# Altium PCB LC_PCB.PcbDoc
Units mil, origin at the board's own origin, x right, y up, seen from the top; angles counter-clockwise.
Board outline 2410.03 x 1610.03 mil, 4 copper layers (Top Layer, Inner1, Inner2, Bottom Layer), stack 61.811 mil thick; 52 components, 35 nets, 171 pads, 104 vias.
Unrouted connection lines stored in the file: 42.
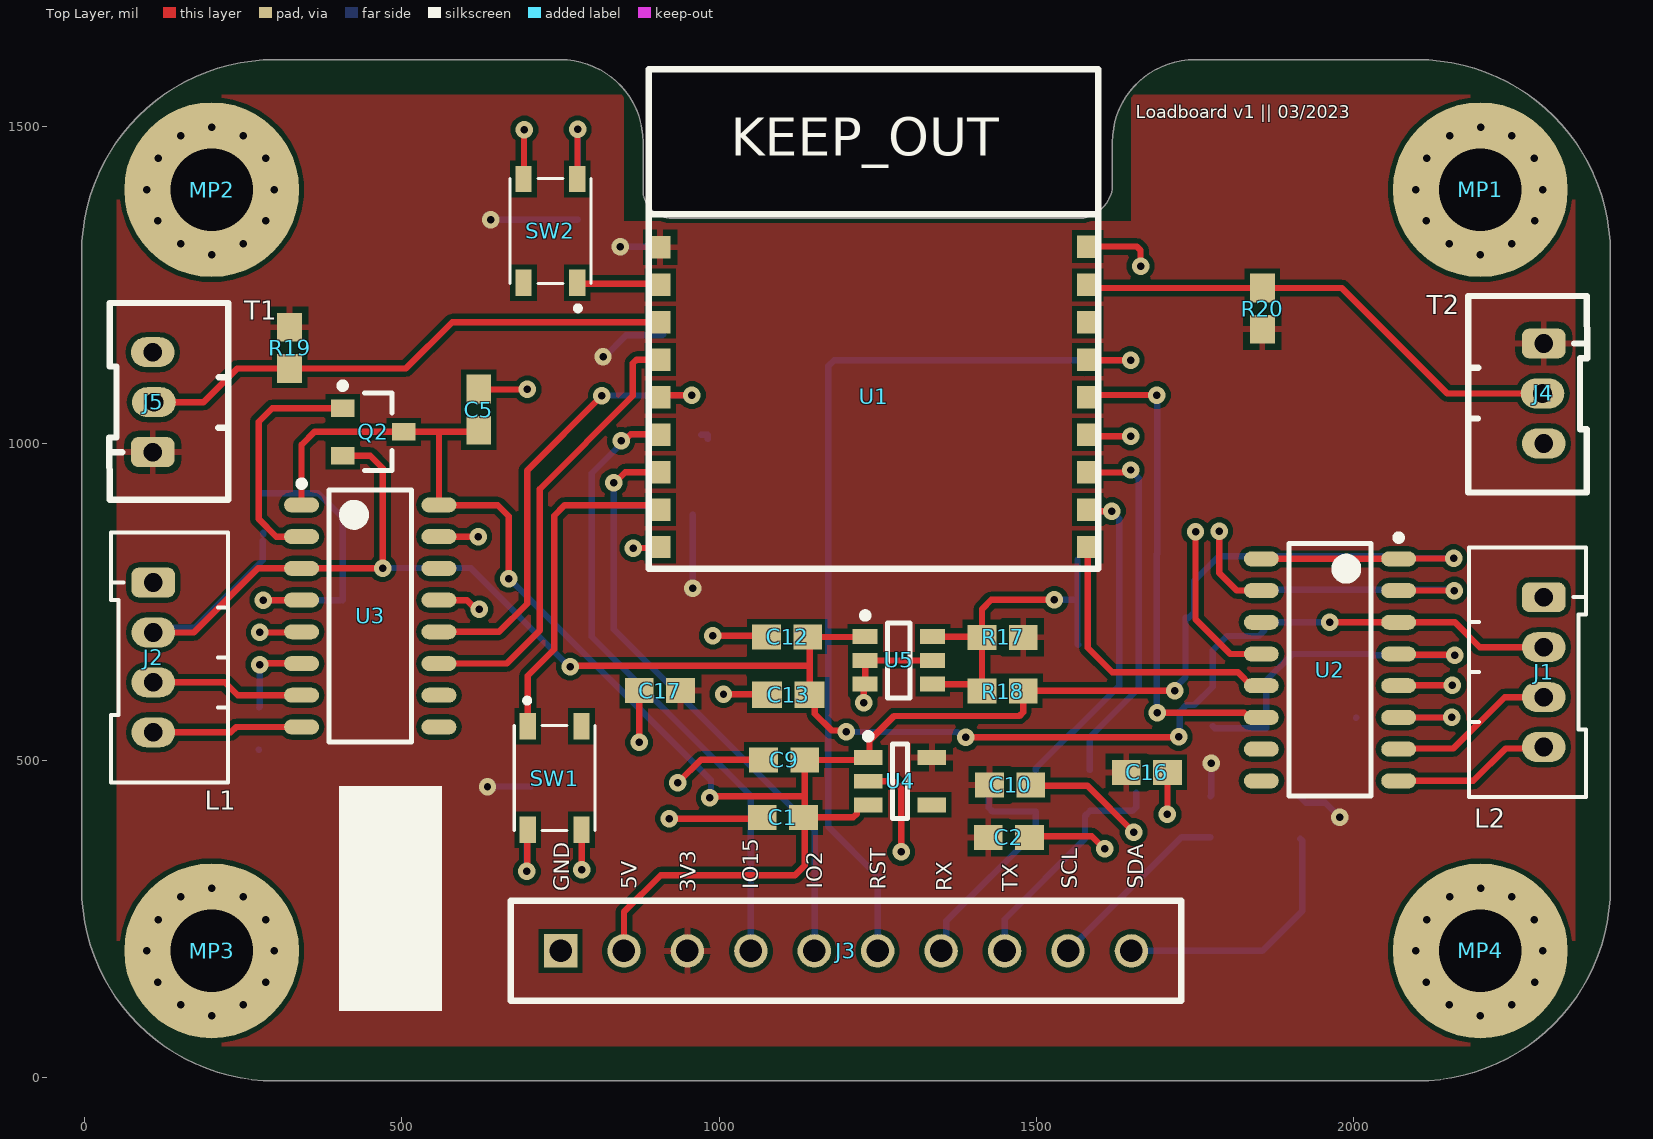
[diagram p0: Top Layer view]
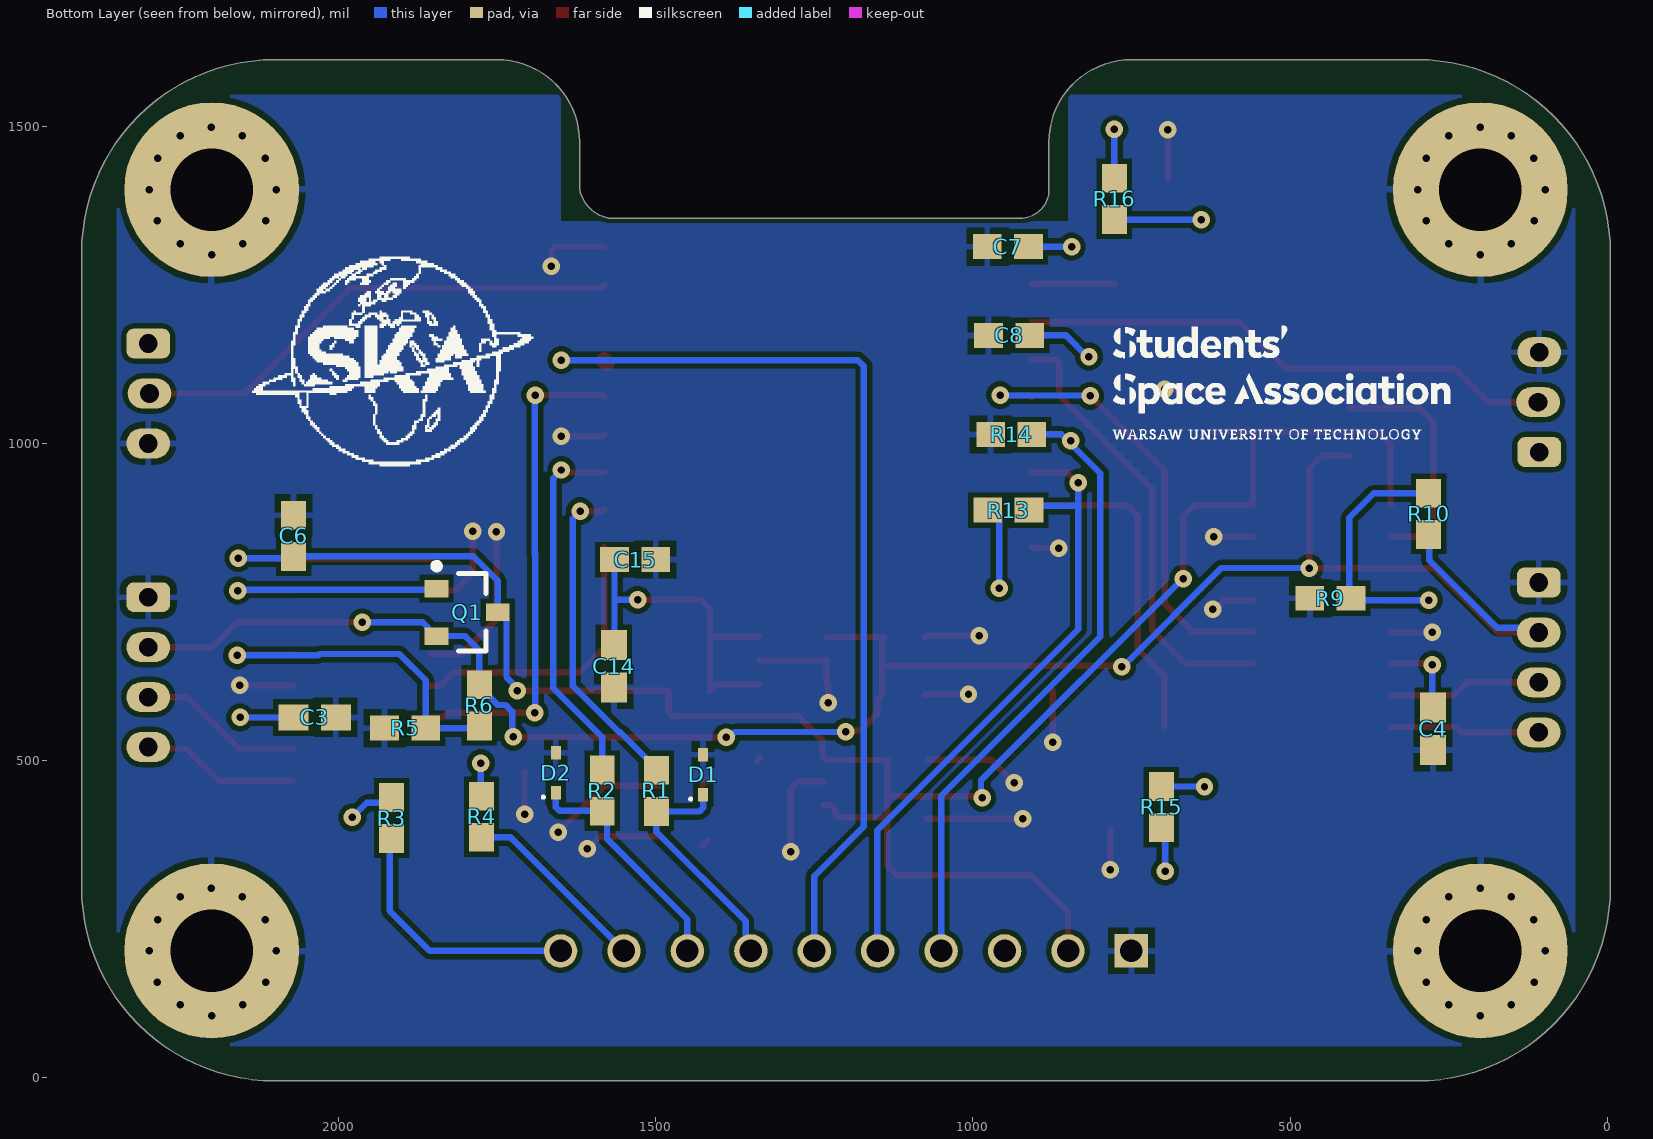
[diagram p1: Bottom Layer view, seen from below]
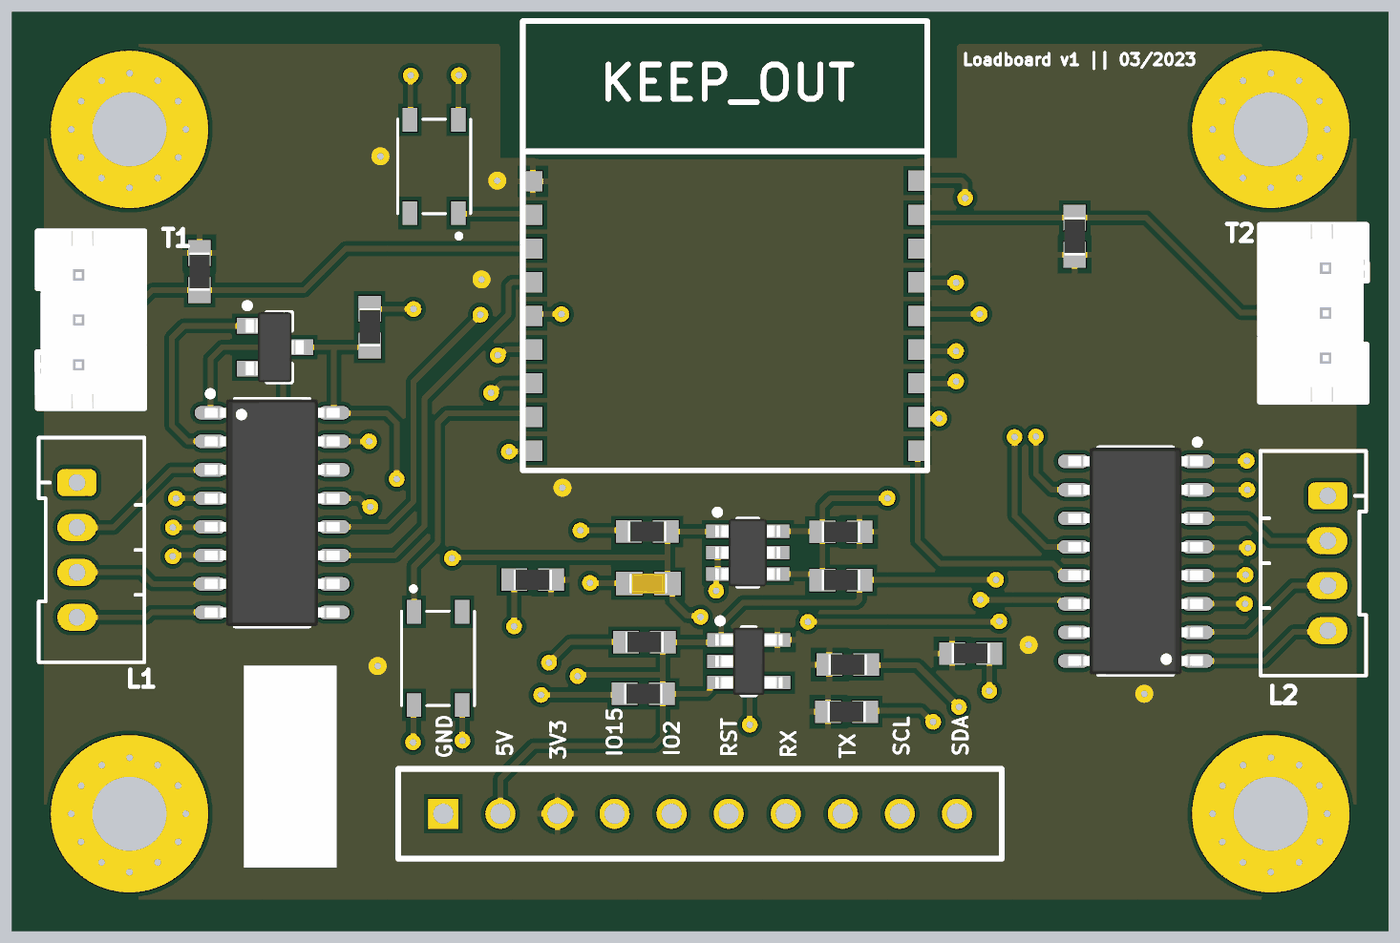
[diagram p2: 3D render of the assembled board from above, using the file's embedded part models]
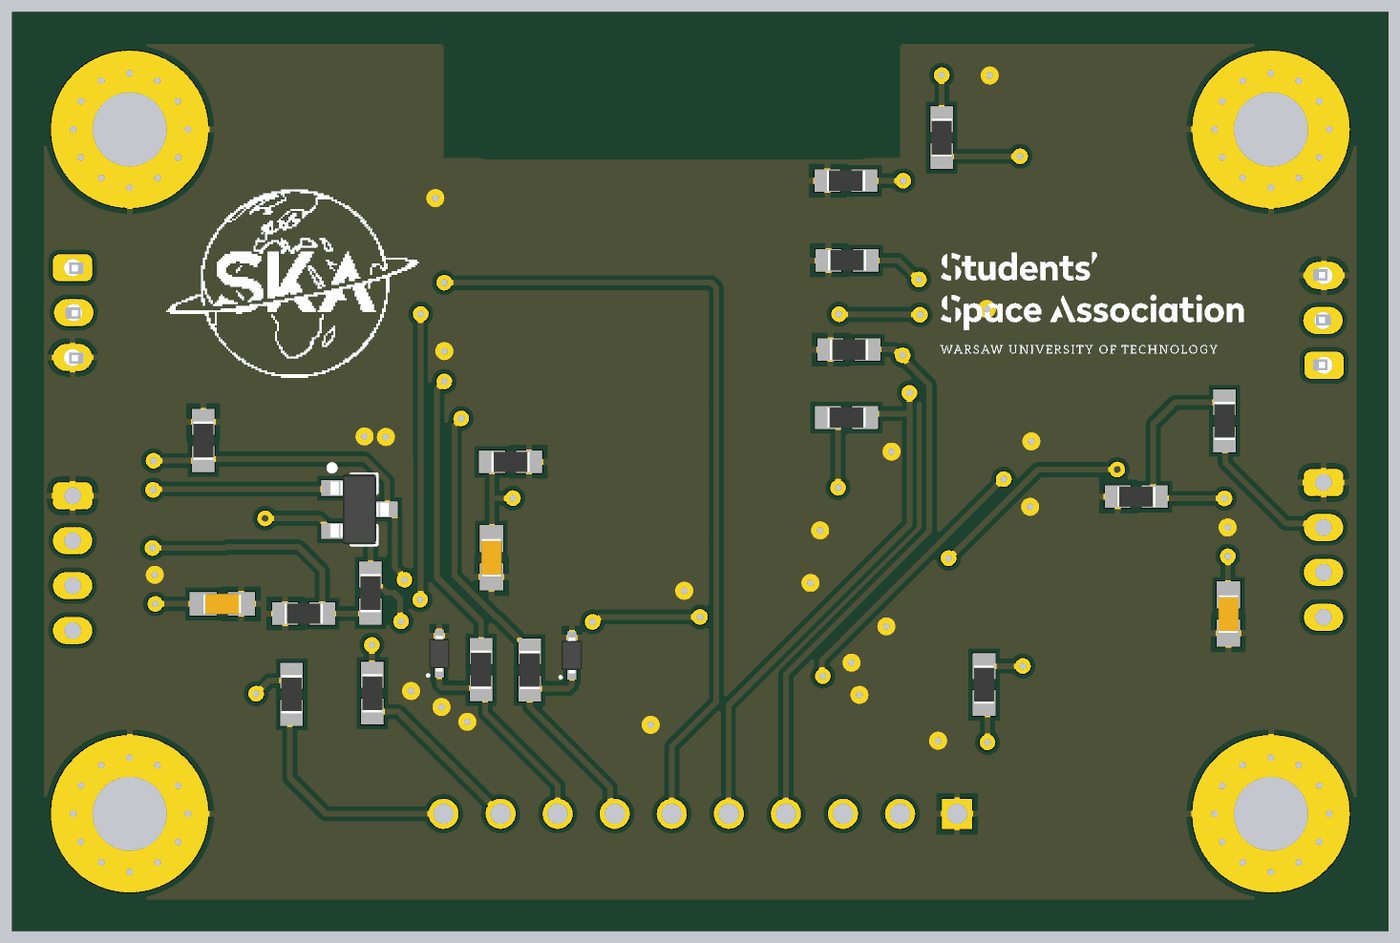
[diagram p3: 3D render of the assembled board from below, using the file's embedded part models]

## Layer stack, top to bottom
Top Solder: solder mask 0.5906, Solder Resist, Dk 3.5
Top Layer: signal copper 1.378
Prepreg1: prepreg 7.874, PP-022, Dk 4.6
Inner1: signal copper 0.689
Core: core 41.9291, Core-043, Dk 4.6
Inner2: signal copper 0.689
Prepreg2: prepreg 7.874, PP-022, Dk 4.6
Bottom Layer: signal copper 1.378
Bottom Solder: solder mask 0.5906, Solder Resist, Dk 3.5

## Board outline
-5.01,300 -5.01,1300 cw(c300,1300) 299.97,1605.02 300,1605.02 750,1605.02 cw(c750,1475) 880.01,1475 880.01,1400 880.01,1399.97 ccw(c925,1400) 925,1355.02 1574.49,1355.02 ccw(c1562.5,1412.5) 1619.98,1400.51 1619.98,1475 cw(c1750,1475) 1750,1605.02 2100,1605.02 cw(c2100,1300) 2405.02,1300 2405.02,300 cw(c2100,300) 2100,-5.01 300,-5.01 cw(c300,300)

## Design rules (kind name [scope] priority, off if disabled: settings)
AssemblyTestPointUsage [All] p1: valid=2
AssemblyTestpoint [All] p1: testpointundercomponent=TRUE minsize=40 maxsize=100 preferedsize=60 minholesize=0 maxholesize=40 preferedholesize=32.01 testpointgrid=0.98 usegrid=TRUE gridoriginx=200 gridoriginy=200 gridtolerance=0.01 allowsidetop=TRUE allowsidebottom=TRUE
BoardOutlineClearance [All] p1: gap=7.87 ignorepadtopadclearanceinfootprint=FALSE
Clearance [All vs not OnLayer('Top Layer') and not OnLayer('BottomLayer')] p1: gap=7.87 ignorepadtopadclearanceinfootprint=FALSE except(3.94: Text-Text; 5: Arc-Arc Arc-Track Track-Track SMDPad-SMDPad; 5.91: Arc-Text Track-Text SMDPad-Text THPad-Text Via-Text Fill-Text Poly-Text Region-Text Text-Hole; 10: Arc-Via Arc-Hole Track-Via Track-Hole SMDPad-Via SMDPad-Hole THPad-Via THPad-Hole Via-Via Via-Hole Fill-Hole Poly-Hole Region-Hole; 12.99: Arc-THPad Track-THPad; 21.26: SMDPad-THPad THPad-THPad)
Clearance Clearance_1 [All vs OnLayer('Top Layer') or OnLayer('Bottom Layer')] p2: gap=7.87 ignorepadtopadclearanceinfootprint=FALSE except(3.54: Arc-Arc Arc-Track Track-Track; 3.94: Text-Text; 5: SMDPad-SMDPad; 5.91: Arc-Text Track-Text SMDPad-Text THPad-Text Via-Text Fill-Text Poly-Text Region-Text Text-Hole; 10: Arc-Via Arc-Hole Track-Via Track-Hole SMDPad-Via SMDPad-Hole THPad-Via THPad-Hole Via-Via Via-Hole Fill-Hole Poly-Hole Region-Hole; 12.99: Arc-THPad Track-THPad; 21.26: SMDPad-THPad THPad-THPad)
ComponentClearance [All] p1: gap=7.87 collisioncheckmode=3 verticalgap=7.87 showdistances=FALSE
DiffPairsRouting [All] p1: maxlimit=19.68 minlimit=7.87 mostfreqgap=11.81 toplayer_minwidth=7.87 toplayer_maxwidth=19.68 toplayer_prefwidth=11.81 midlayer1_minwidth=7.87 midlayer1_maxwidth=19.68 midlayer1_prefwidth=11.81 midlayer2_minwidth=7.87 midlayer2_maxwidth=19.68 midlayer2_prefwidth=11.81 bottomlayer_minwidth=7.87 bottomlayer_maxwidth=19.68 bottomlayer_prefwidth=11.81 maxuncoupledlength=590.55
FabricationTestPointUsage FabricationTestpointUsage [All] p1: valid=2 allowmultiple=FALSE
FabricationTestpoint [All] p1: side=3 testpointundercomponent=TRUE minsize=40 maxsize=100 preferedsize=60 minholesize=0 maxholesize=40 preferedholesize=32.01 testpointgrid=0.98 allowsidetop=TRUE allowsidebottom=TRUE usegrid=TRUE gridoriginx=200 gridoriginy=200 gridtolerance=0.01
Height [All] p1: minheight=0 maxheight=-35835.32 prefheight=0
HoleSize [All] p1: absolutevalues=TRUE maxlimit=248.03 minlimit=7.87 maxpercent=80.000 minpercent=20.000
HoleToHoleClearance [All] p1: gap=21.26 allowstackedmicrovias=TRUE
MinimumAnnularRing [All] p1: minimumring=7.87
MinimumSolderMaskSliver [All] p1: minsoldermaskwidth=0
PlaneClearance [All] p1: clearance=10
PlaneConnect [All] p1: pad.planeconnectstyle=Relief pad.reliefexpansion=20 pad.reliefentries=4 pad.reliefconductorwidth=10 pad.reliefairgap=10 via.planeconnectstyle=Direct via.reliefexpansion=20 via.reliefentries=4 via.reliefconductorwidth=10 via.reliefairgap=10
PolygonConnect [All] p1: thpad.connectstyle=Relief thpad.reliefconductorwidth=10 thpad.reliefentries=4 thpad.polygonreliefangle="90 Angle" thpad.airgapwidth=10 smdpad.connectstyle=Relief smdpad.reliefconductorwidth=10 smdpad.reliefentries=4 smdpad.polygonreliefangle="90 Angle" smdpad.airgapwidth=10 via.connectstyle=Direct via.reliefconductorwidth=10 via.reliefentries=4 via.polygonreliefangle="90 Angle" via.airgapwidth=10
RoutingCorners [All] p1: cornerstyle=45-Degree minsetback=100 maxsetback=200
RoutingLayers [All] p1: top layer_v5=TRUE mid layer 1_v5=FALSE mid layer 2_v5=FALSE bottom layer_v5=TRUE
RoutingVias [All] p1: holewidth=11.81 width=27.56 viastyle="Through Hole" minholewidth=7.87 minwidth=23.62 maxholewidth=248.03 maxwidth=263.78
SilkToSilkClearance [All] p1: silktosilkclearance=0
SilkToSolderMaskClearance [IsPad] p1: minsilkscreentomaskgap=0 clearancetoexposedcopper=TRUE
SolderMaskExpansion [All] p1: expansion=1.97 istentingtop=FALSE
UnRoutedNet [All] p1: checkbadconnections=TRUE
Width [All] p1: maxlimit=393.7 minlimit=7.87 preferedwidth=10
13 further rules are at their usual default settings.

## Classes and differential pairs
net class POWER_OUT: 3V3
net class Power_IN: 5V

## Components (designator, comment, footprint, x,y, rotation, side; value= is the part's Value field where it differs from the comment)
C1 "C" RESC1608X06M[0603] 1100.39,410.43 r0 top value=1u/10V
C2 "C" RESC1608X06M[0603] 1456.69,378.94 r180 top value=1u/10V
C3 "C" CAPC1608X09M[0603] 2037.8,568 r0 bottom value=0.1u/10V
C4 "C" CAPC1608X09M[0603] 274.61,550.2 r90 bottom value=0.1u/10V
C5 "C" RESC1608X06M[0603] 621.06,1053.15 r270 top value=10u/10V
C6 "C" RESC1608X06M[0603] 2070.87,854.33 r270 bottom value=1u/10V
C7 "C" RESC1608X06M[0603] 944.88,1310.04 r180 bottom value=1u/10V
C8 "C" RESC1608X06M[0603] 942.91,1170.28 r180 bottom value=10u/10V
C9 "C" RESC1608X06M[0603] 1102.36,500.98 r0 top value=10u/10V
C10 "C" RESC1608X06M[0603] 1458.66,461.61 r180 top value=10u/10V
C12 "C" RESC1608X06M[0603] 1107.28,694.88 r0 top value=10u/10V
C13 "C" CAPC1608X09M[0603] 1109.25,603.74 r0 top value=0.1u/10V
C14 "C" CAPC1608X09M[0603] 1565.94,649.02 r90 bottom value=0.1u/10V
C15 "C" RESC1608X06M[0603] 1532.48,816.93 r0 bottom value=10u/10V
C16 "C" RESC1608X06M[0603] 1674.21,481.3 r180 top value=100n/10V
C17 "C" RESC1608X06M[0603] 906.5,610.24 r0 top value=100n/10V
D1 "ESD5Z2.5T1G" SODFL160X60-2N 1425.2,477.76 r90 bottom
D2 "ESD5Z2.5T1G" SODFL160X60-2N 1657.48,480.71 r90 bottom
J1 "JST_PH_B4B-PH-K-S" JST_PH_B4B-PH-K-S 2300,639.37 r270 top
J2 "JST_PH_B4B-PH-K-S" JST_PH_B4B-PH-K-S 108,662.63 r270 top
J3 "Gold_Pinx12" Gold_Pinx10 750,200 r90 top
J4 "B3B-PH-K-S(LF)(SN)" B3B-PH-K-S(LF)(SN) 2300,1157.48 r270 top
J5 "B3B-PH-K-S(LF)(SN)" B3B-PH-K-S(LF)(SN) 107.03,986.26 r90 top
MP1 "Mounting hole" Mounting_hole_M3 2200,1400 r0 top
MP2 "Mounting hole" Mounting_hole_M3 200,1400 r0 top
MP3 "Mounting hole" Mounting_hole_M3 200,200.03 r0 top
MP4 "Mounting hole" Mounting_hole_M3 2200,200.03 r0 top
Q1 "MMBT4403" SOT95P240X120-3N 1797.24,733.66 r180 bottom
Q2 "MMBT4403" SOT95P240X120-3N 454.72,1018.11 r0 top
R1 "R" RESC1608X06M[0603] 1499.02,452.17 r90 bottom value=100R/5%
R2 "R" RESC1608X06M[0603] 1584.24,452.62 r90 bottom value=100R/5%
R3 "R" RESC1608X06M[0603] 1916.34,409.45 r90 bottom value=10K/5%
R4 "R" RESC1608X06M[0603] 1774.61,411.42 r90 bottom value=10K/5%
R5 "R" RESC1608X06M[0603] 1895,551 r180 bottom value=68K/5%
R6 "R" RESC1608X06M[0603] 1778,587 r90 bottom value=1K/5%
R9 "R" RESC1608X06M[0603] 436.22,755.91 r180 bottom value=68K/5%
R10 "R" RESC1608X06M[0603] 281.5,888.78 r270 bottom value=1K/5%
R13 "R" RESC1608X06M[0603] 943.9,894.68 r180 bottom value=10K/5%
R14 "R" RESC1608X06M[0603] 939.46,1013.83 r0 bottom value=10K/5%
R15 "R" RESC1608X06M[0603] 702.72,426.5 r90 bottom value=10K/5%
R16 "R" RESC1608X06M[0603] 777,1385.52 r270 bottom value=10K/5%
R17 "R" RESC1608X06M[0603] 1446.85,694.29 r0 top value=0/10%
R18 "R" RESC1608X06M[0603] 1446.85,609.65 r0 top value=0/10%
R19 "R" RESC1608X06M[0603] 322.83,1150.59 r270 top value=4k7/5%
R20 "R" RESC1608X06M[0603] 1856.3,1212.6 r90 top value=4k7/5%
SW1 "PTS810 SJM 250 SMTR LFS" "PTS810 SJM 250 SMTR LFS" 740.72,472.5 r270 top
SW2 "PTS810 SJM 250 SMTR LFS" "PTS810 SJM 250 SMTR LFS" 734,1335 r90 top
U1 "ESP-WROOM-02 module" ESP-WROOM-02 1236.71,1086.67 r0 top
U2 "ADC_HX711" SOP127P600X259-16N#1 1963,643 r180 top
U3 "ADC_HX711" SOP127P600X259-16N#2 450,728 r0 top
U4 "MCP1802T-3302I/OT" SOT95P280X145-5N 1285.2,467.4 r0 top
U5 "MCP1501T-33E/CHY" SOT95P280X125-6N 1283.46,657.87 r0 top

## Footprints (in the part's own frame and the unit in brackets; to place one, negate y for a bottom-side part, rotate by r counter-clockwise, add the part's x,y. Pads: shape width x height; smd on the part's side, far side on the other; paste and mask are expansions set on the pad)
B3B-PH-K-S(LF)(SN) [mm]
  rrect50% 1.2x1.75 hole 0.75: 1(0,0)
  oval 1.2x1.75 hole 0.75: 2(2,-0.05) 3(4,0)
  silkscreen extent -1.91,-3.03 5.97,1.74, body extent -1.92,-2.9 5.97,1.6, height 5.81
CAPC1608X09M[0603] [mm] "Chip Capacitor, 2-Leads, Body 1.60x0.80mm, IPC Low Density"
  rect 1.2x1.05 smd: 1(-0.85,0) 2(0.85,0)
  body extent -0.85,-0.45 0.85,0.45, height 0.9
ESP-WROOM-02 [mm] "The ESP8266 chip for  wi-fi communication in the 2.4 GHz band. 3-3.6V, SMD"
  rect 0.85x0.9 smd: 1(-8.375,5.65) 2(-8.375,4.15) 3(-8.375,2.65) 4(-8.375,1.15) 5(-8.375,-0.35) 6(-8.375,-1.85) 7(-8.375,-3.35) 8(-8.375,-4.85) 9(-8.375,-6.35) 10(8.745,-6.35) 11(8.745,-4.85) 12(8.745,-3.35) 13(8.745,-1.85) 14(8.745,-0.35) 15(8.745,1.15) 16(8.745,2.65) 17(8.745,4.15) 18(8.745,5.675)
  silkscreen extent -8.83,-7.22 9.17,12.78
Gold_Pinx10 [mm] "Gold pin connector with 10 pin e = 2.54mm"
  rect 1.34x1.34 hole 0.9: 1(0,0)
  round 1.34 hole 0.9: 2(0,-2.54) 3(0,-5.08) 4(0,-7.62) 5(0,-10.16) 6(0,-12.7) 7(0,-15.24) 8(0,-17.78) 9(0,-20.32) 10(0,-22.86)
  silkscreen extent -2,-24.86 2,2
JST_PH_B4B-PH-K-S [mm] "JST 4-pin connector, male, vertical, pitch 2.00mm"
  rrect50% 1.2x1.75 hole 0.75: 1(-3,0)
  oval 1.2x1.75 hole 0.75: 2(-1,0) 3(1,0) 4(3,0)
  silkscreen extent -5,-3 5,1.7, body extent -4.95,-3 4.95,1.7, height 6.01
Mounting_hole_M3 [mm] "Mounting hole for M3 screw"
  round 7 / inner round 5 / far side round 7 hole 3.3 unplated: 1(0,0)
"PTS810 SJM 250 SMTR LFS" [mm] "switch"
  rect 1.05x0.65 smd: 1(-2.075,-1.075) 2(2.075,-1.075) 3(-2.075,1.075) 4(2.075,1.075)
  silkscreen extent -3.2,-1.62 2.1,1.62
RESC1608X06M[0603] [mm] "Chip Resistor, 2-Leads, Body 1.60x0.80mm, IPC Low Density"
  rect 1.15x1 smd: 1(-0.825,0) 2(0.825,0)
  body extent -0.85,-0.45 0.85,0.45, height 0.55
SODFL160X60-2N [mm] "SODFL, 2-Leads, Body 0.80x1.60mm, IPC Medium Density"
  rect 0.55x0.4 smd: 1(-0.8,0) 2(0.8,0)
  silkscreen extent -1.02,0.45 -0.93,0.55, body extent -0.8,-0.45 0.8,0.45, height 0.6
SOP127P600X259-16N#1 [mm] "SOP, 16-Leads, Body 9.90x3.90mm, Pitch 1.27mm, IPC Medium Density"
  oval 1.4x0.6 smd: 1(-2.75,-4.445) 2(-2.75,-3.175) 3(-2.75,-1.905) 4(-2.75,-0.635) 5(-2.75,0.635) 6(-2.75,1.905) 7(-2.75,3.175) 8(-2.75,4.445) 9(2.75,4.445) 10(2.75,3.175) 11(2.75,1.905) 12(2.75,0.635) 13(2.75,-0.635) 14(2.75,-1.905) 15(2.75,-3.175) 16(2.75,-4.445)
  silkscreen extent -2.88,-5.42 1.65,5.05, body extent -3,-5.05 3,5.05, height 2.59
SOP127P600X259-16N#2 [mm] "SOP, 16-Leads, Body 9.90x3.90mm, Pitch 1.27mm, IPC Medium Density"
  oval 1.4x0.6 smd: 1(-2.75,4.445) 2(-2.75,3.175) 3(-2.75,1.905) 4(-2.75,0.635) 5(-2.75,-0.635) 6(-2.75,-1.905) 7(-2.75,-3.175) 8(-2.75,-4.445) 9(2.75,-4.445) 10(2.75,-3.175) 11(2.75,-1.905) 12(2.75,-0.635) 13(2.75,0.635) 14(2.75,1.905) 15(2.75,3.175) 16(2.75,4.445)
  silkscreen extent -2.87,-5.05 1.65,5.42, body extent -3,-5.05 3,5.05, height 2.59
SOT95P240X120-3N [mm] "SOT23, 3-Leads, Body 2.92x2.40mm, Pitch 0.95mm, IPC Medium Density"
  rect 0.95x0.7 smd: 1(-1.225,0.95) 2(-1.225,-0.95) 3(1.225,0)
  silkscreen extent -1.35,-1.55 0.75,1.97, body extent -1.34,-1.56 1.34,1.56, height 1.2
SOT95P280X125-6N [mm] "SOT23, 6-Leads, Body 2.90x2.80mm, Pitch 0.95mm, IPC Medium Density"
  rect 1x0.6 smd: 1(-1.35,0.95) 2(-1.35,0) 3(-1.35,-0.95) 4(1.35,-0.95) 5(1.35,0) 6(1.35,0.95)
  silkscreen extent -1.47,-1.5 0.45,1.92, body extent -1.45,-1.5 1.45,1.5, height 1.25
SOT95P280X145-5N [mm] "SOT23, 5-Leads, Body 2.90x2.80mm, Pitch 0.95mm, IPC Medium Density"
  rect 1.15x0.6 smd: 1(-1.275,0.95) 2(-1.275,0) 3(-1.275,-0.95) 4(1.275,-0.95) 5(1.275,0.95)
  silkscreen extent -1.4,-1.5 0.3,1.92, body extent -1.5,-1.5 1.5,1.5, height 1.45

## Part data
C1 C2 C3 C4 C5 C6 C7 C8 C9 C10 C12 C13 C14 C15 C16 C17: "Standard capacitor", Package=0603
D1 D2: library part D_Zener, "ESD protection diode, 4V", Package=SOD−523, Datasheet=https://www.onsemi.com/pdf/datasheet/esd5z2.5t1-d.pdf, PN=ESD5Z2.5T1G
J1 J2: "JST 4-pin connector, male, vertical, pitch 2.00mm", HelpURL=https://www.tme.eu/Document/bde47a97a79ef7b2143e7f603cd40725/PH.pdf, PN=B4B-PH-K-S
J3: library part Gold_pin, "GoldPin Conector x12 pitch 2.54"
J4 J5: "Connector Header, PH Series, 3 Position, 2.00mm, Through Hole, Press-Fit, Solder, Natural", Datasheet=https://octopart.com/datasheet/b3b-ph-k-s%28lf%29%28sn%29-jst-248869, HelpURL=https://octopart.com/b3b-ph-k-s%28lf%29%28sn%29-jst-248869
Q1 Q2: library part sPNP, "Bipolar Transistors - BJT SOT-23 PNP GEN PUR", Package=SOT-23-3L, Datasheet=https://www.onsemi.com/pdf/datasheet/mmbt4403-d.pdf, PN=MMBT4403
R1 R2 R3 R4 R5 R6 R9 R10 R13 R14 R15 R16 R17 R18 R19 R20: "Standard resistor", Package=0603
SW1 SW2: library part PTS810XXXXXXXX, "TACT microswitch; SPST-NO; Pos: 2; 0.05A/16VDC; SMT; lack", Datasheet=https://www.tme.eu/Document/07a775ba34ae8afc76cf6dcf9fe6d1c4/PTS810SJG250SMTRLF.PDF, HelpURL=https://www.tme.eu/pl/details/pts810sjm250smtrlf/mikroprzelaczniki-tact/c-k/pts810-sjm-250-smtr-lfs/
U1: library part ESP-WROOM-02, "The ESP8266 chip for wi-fi communication in the 2.4 GHz band. 3-3.6V SMD", Datasheet=https://www.espressif.com/sites/default/files/documentation/0c-esp-wroom-02_datasheet_en.pdf, Help_URL=https://botland.store/esp8266-wifi-modules/5391-wifi-system-esp8266-esp-wroom-02-smd-5904422333508.html
U2 U3: library part HX711, "24-Bit Analog-to-Digital Converter (ADC) for Weigh Scales", Package=SOP-16L, Datasheet=https://cdn.sparkfun.com/datasheets/Sensors/ForceFlex/hx711_english.pdf
U4: library part MCP1802T-3302I, "LDO Voltage Regulators 200 mA low quiescent current and low noise LDO", Package=SOT-23-5, Datasheet=https://www.tme.eu/Document/a35250a3ec1de112ad6016307ea8a51d/MCP1802T-1802IO.pdf, HelpURL=https://www.tme.eu/pl/en/details/mcp1802t-3302io/ldo-unregulated-voltage-regulators/microchip-technology/mcp1802t-3302i-ot/
U5: "Voltage References Precision Buffered Voltage Reference", Package=SOT-23, DATA_SHEET=https://www.mouser.pl/datasheet/2/268/MCP1501_Data_Sheet_DS20005474F-2932251.pdf, HELP_LINK=https://www.mouser.pl/ProductDetail/Microchip-Technology-Atmel/MCP1501T-33E-CHY?qs=8cKuZ6Ok2lZxgW6mutm0tA%3D%3D

## Via types
v1: diameter 27.56, hole 11.81, Top Layer to Bottom Layer, 56 vias
v2: diameter 39.37, hole 11.81, Top Layer to Bottom Layer, 48 vias

## Nets (pads, with @x,y where several pads share a name; then routed paths per layer and width w, separated by ;. In a path a pad name is that pad's centre, name@x,y a point inside that pad or via, vN(x,y) a via of type N, cw(c..) or ccw(c..) an arc to the next point about the centre after c; other vN are vias at no path point)
3V3: C2.2 C7.2 C8.2 C10.2 C16.2 C17.2 J3.3 J4.1 J5.1 R3.2 R4.2 R13.1 R15.2 R16.2 R17.2 R19.1 R20.1 U1.1 U4.5 | length 661.9
  Top Layer w10: U1.1@905.07,1311.02 U1.1 ; U4.5 U4.5@1340.25,499.94 ; C10.2@1416.05,471.74 C10.2 ; C2.2@1418.8,373.52 C2.2@1426.18,366.14
  Bottom Layer w10: v1(634.84,459.06) 702.65,459.06 R15.2 ; v1(639.76,1352.76) 776.72,1352.76 R16.2 ; v1(816.93,1136.81) 819.78,1136.81 853.24,1170.28 C8.2 C8.2@912.4,1172.24 ; v1(844.49,1310.04) C7.2 ; v1(958.66,771.65) R13.1@958.66,887.8 ; R4.2 1775.59,444.88 v1(1775.59,496.06) ; R3.2 1924.83,433.44 1955.34,433.44 v1(1978.35,410.43) ; J4.1@2299.7,1157.18 J4.1
5V: C1.2 C5.2 C6.2 C9.2 J3.2 Q1.3 Q2.3 R18.2 U2.1 U2.16 U3.1 U3.16 U4.1 U4.3 | length 3577
  Top Layer w10: U3.1 341.73,997.64 362.2,1018.11 Q2.3 558.12,1018.11 ; C5.2@621.06,1018.11 558.12,1018.11 ; v1(668.31,786.81) 668.31,885.24 651.04,902.5 558.77,902.5 U3.16 558.27,1017.96 558.12,1018.11 ; J3.2 850,261.42 907.88,319.3 1119.55,319.3 1134.84,334.59 C1.2@1134.84,410.43 ; v1(985.24,441.34) 987.09,443.19 993.94,443.19 994.45,443.7 1134.84,443.7 ; U4.3 1224.17,430 1217.36,423.19 1217.36,416.29 1211.5,410.43 C1.2@1134.84,410.43 ; U4.1 1231.18,500.98 C9.2 1134.84,443.7 ; U4.1@1236.98,506.78 1236.98,531.66 1275.59,570.28 1473.47,570.28 1479.33,576.13 R18.2 1479.92,610.24 v1(1718.5,610.24) ; U2.16 U2.1 2071.77,818.5 2157.5,818.5 v1(2158,819) ; C1.2@1134.84,410.43 1134.84,443.7
  Bottom Layer w10: v1(668.31,786.81) 669.29,786.81 987.09,469.01 987.09,443.19 v1(985.24,441.34) ; v1(1718.5,610.24) 1718.5,614.99 1735.31,631.8 1735.31,724.88 1740.24,724.88 Q1.3 1749.02,783.46 1787.4,821.85 C6.2 2073.72,819 v1(2158,819)
ESP_DOUT: 
ESP_DOUT_1: U1.10 U2.12 | length 457.3
  Top Layer w10: U1.10 1581,678 1619.98,639.02 1817.97,639.02 1838.98,618 U2.12
ESP_DOUT_2: U1.5 U3.12 | length 727.4
  Top Layer w10: U3.12 653,703 697.35,747.35 697.35,957.35 v1(815,1075) ; U1.5 910.09,1076 v1(956.94,1076)
  Bottom Layer w10: v1(815,1075) 815.5,1075.5 956.44,1075.5 v1(956.94,1076)
ESP_EN: SW2.1 U1.2 | length 131.3
  Top Layer w10: SW2.1@776.32,1251.68 905.36,1251.68 U1.2
ESP_I2C_SCL: J3.9 R4.1 | length 298.7
  Bottom Layer w10: J3.9 1728.94,378.94 R4.1
ESP_I2C_SDA: J3.10 R3.1 | length 410.7
  Bottom Layer w10: J3.10 1856.5,200 1919.29,262.8 1919.29,374.02 R3.1
ESP_IO0: SW1.1 U1.8 | length 525.5
  Top Layer w10: SW1.1 698.4,633.83 740.16,675.59 740.16,886.14 756.32,902.31 900.4,902.31 U1.8
ESP_IO2: J3.5 R13.2 U1.7 | length 1045.2
  Top Layer w10: v1(833.66,937.99) 835.22,937.99 852.01,954.78 U1.7
  Bottom Layer w10: v1(833.66,937.99) 833.66,901.57 ; R13.2 904.53,901.57 833.66,901.57 ; J3.5@1150.59,184.99 1150.59,390.16 833.66,707.09 833.66,901.57
ESP_IO14: J5.2 R19.2 U1.3 | length 850.2
  Top Layer w10: J5.2 187.05,1065 240.16,1118.11 R19.2 506.25,1118.11 579.14,1191 U1.3
ESP_IO15: J3.4 R14.1 U1.6 | length 1056.2
  Top Layer w10: v1(845.47,1003.94) 850.22,1003.94 860.46,1014.17 906.65,1014.17 U1.6
  Bottom Layer w10: R14.1 906.65,1014.17 860.46,1014.17 799,952.71 799,695.41 1050,444.41 J3.4
ESP_IO16: J4.2 R20.2 U1.17 | length 788
  Top Layer w10: U1.17 1585.98,1245.08 R20.2 1981.69,1245.08 2148.03,1078.74 J4.2
ESP_RST: J3.6 U1.15 | length 1509.2
  Top Layer w10: U1.15@1581.34,1131.3 v1(1648.62,1131.3)
  Top Layer w25: U1.15@1576.77,1126.73 1581,1130.96 U1.15
  Bottom Layer w10: J3.6 1250,317.91 1171.86,396.06 1171.86,1121.93 1181.23,1131.3 v1(1648.62,1131.3)
ESP_RX: R1.2 U1.11 | length 508
  Top Layer w10: U1.11 1583.61,893.11 v1(1619.09,893.11)
  Bottom Layer w10: R1.2 1499.02,487.6 1555.86,544.44 1557.33,544.44 1630.91,618.01 1630.91,881.3 v1(1619.09,893.11)
ESP_SCK_1: U1.14 U2.11 | length 779.1
  Top Layer w10: U1.14 1584.29,1076.18 v1(1689.96,1076.18) ; v1(1690.94,575.24) 1828.05,575.24 1835.3,568 U2.11
  Bottom Layer w10: v1(1689.96,1076.18) 1690.45,1075.69 1690.45,826.08 1689.72,825.35 1689.72,576.46 v1(1690.94,575.24)
ESP_SCK_2: U1.4 U3.11 | length 707.7
  Top Layer w10: U3.11 665,653 717,705 717,928 863.94,1074.94 863.94,1126.09 869.8,1131.94 U1.4
ESP_TX: R2.2 U1.12 | length 579.8
  Top Layer w10: U1.12 1581.65,954.13 1642.06,954.13 1646,958.07 v1(1648.62,958.07)
  Bottom Layer w10: R2.2 1584.24,537.05 1661.42,614.22 1661.42,945.28 v1(1648.62,958.07)
GND: C1.1 C2.1 C3.1 C4.1 C5.1 C6.1 C7.1 C8.1 C9.1 C10.1 C12.1 C13.1 C14.1 C15.1 C16.1 C17.1 D1.2 D2.2 J1.1 J2.1 J3.1 J4.3 J5.3 MP1.1 MP2.1 MP3.1 MP4.1 R5.1 R9.1 R14.2 SW1.4 SW2.4 U1.9 U1.13 U1.18 U2.5 U2.13 U2.15 U3.5 U3.13 U3.15 U4.2 U5.2 U5.3 U5.5 | length 2397.7
  Top Layer w10: v1(276,702) 340.73,702 U3.5 ; U3.13 602.48,753 617.3,738.19 v1(622.05,738.19) ; U3.15 v1(620,853) ; C5.1@628.94,1085.04 v1(697.83,1085.04) ; SW2.4 692.3,1417.31 692.3,1493.87 v1(692.91,1494.49) ; SW1.4 783.26,390.59 783.26,328.36 v1(783.46,328.15) ; v1(864.84,835) 905.31,835 U1.9 ; v1(874.02,528.54) 876.71,531.24 876.71,534.03 876.64,534.03 874.02,536.65 C17.1 ; v1(921.26,408.46) 1073.17,408.46 C1.1@1074.16,409.45 ; v1(935.04,464.96) 971.46,501.38 C9.1@1069.88,501.38 ; v1(990.16,696.85) 1072.83,696.85 C12.1 ; v1(1006.89,604.72) 1074.8,604.72 C13.1 ; v1(1228.11,590.97) 1228.11,618.27 U5.3 U5.2 U5.5 ; U4.2 1275.47,467.4 1287,455.87 v1(1287,356) ; C10.1@1491.14,460.04 1580.71,460.04 v1(1653.54,387.2) ; C2.1@1492.19,380.91 1587.25,380.91 1606.94,361.22 v1(1608.27,361.22) ; U1.13 1583.61,1011.22 v1(1648.62,1011.22) ; U1.18 1581.34,1310.43 1658.51,1310.43 1664.37,1304.58 v1(1664.37,1279.53) ; v1@1706.69,415.35 1706.05,415.99 1706.05,417.37 1706.74,418.06 1706.74,481.25 C16.1 ; v1(1750.98,860.63) 1750.98,722.83 1805.82,668 U2.13 ; v1(1788.39,861.61) 1788.39,795.67 1816.06,768 U2.15 ; U2.5 2071.77,618.5 2155.5,618.5 v1(2156,619)
  Bottom Layer w10: C4.1@273.94,517.39 C4.1 ; R14.2 981.79,1013.83 R14.2@981.79,1006.94 ; C3.1@2004,567.66 C3.1
  other v1: 1706.74,415.3
  other v2: 200,97.67 2200,97.67 151.11,114.73 249.54,114.76 2151.11,114.73 2249.54,114.76 115.09,150.75 285.56,150.79 2115.09,150.75 2285.56,150.79 97.96,200 298.75,200 2097.96,200 2298.75,200 115.41,249.21 285.24,249.25 2115.41,249.21 2285.24,249.25 151.44,285.24 249.54,285.24 2151.44,285.24 2249.54,285.24 200.33,298.43 2200.33,298.43 200,1297.64 2200,1297.64 151.11,1314.69 249.54,1314.73 2151.11,1314.69 2249.54,1314.73 115.09,1350.72 285.56,1350.75 2115.09,1350.72 2285.56,1350.75 97.96,1399.97 298.75,1399.97 2097.96,1399.97 2298.75,1399.97 115.41,1449.18 285.24,1449.21 2115.41,1449.18 2285.24,1449.21 151.44,1485.2 249.54,1485.2 2151.44,1485.2 2249.54,1485.2 200.33,1498.39 2200.33,1498.39
NetC3_2: C3.2 U2.6 | length 167.5
  Top Layer w10: U2.6 v1(2155,568)
  Bottom Layer w10: C3.2 v1(2155,568)
NetC4_2: C4.2 U3.6 | length 136.3
  Top Layer w10: v1@274,654 274.5,653.5 341.23,653.5 U3.6
  Bottom Layer w10: C4.2 275.61,584.66 v1(275.61,651.39)
NetC14_2: C14.2 C15.2 R17.1 R18.1 U5.4 U5.6 | length 580.9
  Top Layer w10: U5.4 1403.54,620.47 R18.1 R17.1 ; U5.6 1413.39,695.28 R17.1 ; v1(1528.54,753.35) 1429.13,753.35 1414.37,738.58 R17.1
  Bottom Layer w10: v1(1528.54,753.35) 1564.96,753.35 ; C15.2 1564.96,753.35 ; C14.2 1564.96,683.46 1564.96,753.35
NetD1_1: D1.1 J3.7 R1.1 | length 385.8
  Bottom Layer w10: J3.7@1350,192.62 1358.18,200.8 1358.18,227.15 1358.27,227.24 1358.27,247.05 1499.13,387.9 1499.13,419.58 R1.1 1431.05,419.68 1425.2,425.54 D1.1
NetD2_1: D2.1 J3.8 R2.1 | length 374.3
  Bottom Layer w10: J3.8 1450,249.8 1576.75,376.55 1576.75,412.65 R2.1 1584.77,420.67 1651.62,420.67 1657.48,426.53 D2.1
NetJ1_3: J1.3 U2.7 | length 262.7
  Top Layer w10: U2.7 2072.3,519.03 2157.42,519.03 2238.39,600 J1.3
NetJ1_4: J1.4 U2.8 | length 258
  Top Layer w10: U2.8 2189.06,468 2240.16,519.09 J1.4@2308.07,519.09
NetJ2_3: J2.3 U3.7 | length 242.1
  Top Layer w10: J2.3 220.64,623.26 240.9,603 U3.7
NetJ2_4: J2.4 U3.8 | length 237.2
  Top Layer w10: J2.4 230.15,544.52 238.63,553 U3.8
NetQ1_1: Q1.1 U2.2 | length 403
  Top Layer w10: U2.2 v1(2159,768)
  Bottom Layer w10: Q1.1 1847,769.53 2157.47,769.53 v1(2159,768) v1@2158.7,767.7
NetQ2_1: Q2.1 U3.2 | length 373.9
  Top Layer w10: U3.2 301.92,853 274,880.92 274,1034.24 295.28,1055.51 Q2.1
NetR5_2: R5.2 R6.1 U2.4 | length 566.5
  Top Layer w10: U2.4 2072.27,667 2159,667 v1(2160,666)
  Bottom Layer w10: R6.1 1781.52,551 R5.2 1862.52,626.52 1904,668 2029.69,668 2031.69,666 v1(2160,666)
NetR9_2: R9.2 R10.1 U3.4 | length 451.6
  Top Layer w10: v1(281.5,752.95) U3.4
  Bottom Layer w10: v1(281.5,752.95) R9.2@401.97,752.95 ; R10.1 368.11,921.26 406.69,882.68 R9.2@406.69,752.95
NetR15_1: R15.1 SW1.2 | length 137.5
  Top Layer w10: v1(696.85,325.2) 697.63,325.97 697.63,390.03 SW1.2
  Bottom Layer w10: v1(696.85,325.2) 696.85,388.14 R15.1
NetR16_1: R16.1 SW2.2 | length 155.6
  Top Layer w10: SW2.2 776.66,1417.03 776.66,1494.66 v1(777,1495)
  Bottom Layer w10: R16.1 v1(777,1495)
VREF: C12.2 C13.2 J1.2 J2.2 Q1.2 Q2.2 R6.2 R10.2 U2.3 U3.3 U5.1 | length 3154.3
  Top Layer w10: J2.2 172.08,702 273.08,803 U3.3 468.94,803 v1(469.49,803.54) 469.49,961.02 449.8,980.71 Q2.2 ; v1(765,648.03) 766.48,649.51 1142.72,649.51 ; v1(1200.64,545.11) 1198.36,547.38 1177.42,547.38 1150.87,573.93 1150.87,595.58 C13.2 1142.72,649.51 ; U5.1@1229.92,694.88 C12.2 1142.72,691.93 1142.72,649.51 ; v1(1388.78,536.42) 1389.27,536.91 1723.92,536.91 v1(1724.41,537.4) ; v1(1962.6,718) U2.3 2160,718 2199.26,678.74 J1.2
  Bottom Layer w10: J2.2 115.13,709.13 173.69,709.13 280.35,815.78 R10.2@280.35,846.46 ; R10.2 R10.2@281.5,859.25 ; v1(469.49,803.54) 608.27,803.54 763.78,648.03 v1(765,648.03) ; v1(1200.64,545.11) 1375.34,545.11 1384.03,536.42 v1(1388.78,536.42) ; v1(1724.41,537.4) 1726.22,539.21 1726.22,577.25 1736.67,587.7 1749.17,587.7 1778,616.53 R6.2 1778,674.06 1800.2,696.26 Q1.2 1850.39,696.26 1859.17,705.04 1859.17,709.96 1867.21,718 v1(1962.6,718)
pads on no net: SW1.3 SW2.3 U1.16 U2.9 U2.10 U2.14 U3.9 U3.10 U3.14 U4.4

## Polygon pours and split planes (outlines as drawn)
GND on Bottom Layer "GND_L04_P002" (solid, pour order 2): 200,1550 50,1400 50,200 200,50 2200,50 2350,200 2350,1400 2200,1550 1650,1550 1650,1350 850,1350 850,1550
3V3 on Top Layer "3V3_L01_P001" (solid, pour order 1): 200,1550 50,1400 50,200 200,50 2200,50 2350,200 2350,1400 2200,1550 1650,1550 1650,1350 850,1350 850,1550

## Other copper
Top Layer:
  region: 844.49,1310.04
  region: 844.49,1310.04
  region: 844.49,1310.04

## Silkscreen, mask and mechanical layers (free items; w line width, h text height)
Top Overlay:
  region: 562.99,105.31 562.99,459.65 400.59,459.65 400.59,105.31
  text "Loadboard v1 || 03/2023" at 1656.59,1512.89 h20
  text "T2" at 2115.28,1203.87 h30
  text "T1" at 251.11,1195.01 h30
  text "L1" at 189.1,422.37 h30
  text "L2" at 2190.09,393.83 h30
  text "IO2" at 1162.32,298.31 h25 r90
  text "SCL" at 1564.88,298.31 h25 r90
  text "SDA" at 1668.23,298.31 h25 r90
  text "5V" at 870,297.32 h25 r90
  text "IO15" at 1061.93,297.32 h25 r90
  text "RST" at 1262.72,296.34 h25 r90
  text "GND" at 763.7,294.37 h25 r90
  text "RX" at 1367.05,294.37 h25 r90
  text "TX" at 1470.39,294.37 h25 r90
  text "3V3" at 963.5,292.4 h25 r90
Bottom Overlay:
  drawing of 106 lines, arcs and shapes, not listed

## Text inside footprints (layer, text, board x,y; h text height)
U1: Top Overlay "KEEP_OUT" at 1018.36,1453.12 h60